# Altium PCB MAXREFDES117.PcbDoc
Units mil, origin at the board's own origin, x right, y up, seen from the top; angles counter-clockwise.
Board outline 915 x 550 mil, 2 copper layers (Top Layer, Bottom Layer); 2 components, 4 nets, 20 pads, 0 vias.
Unrouted connection lines stored in the file: 1.
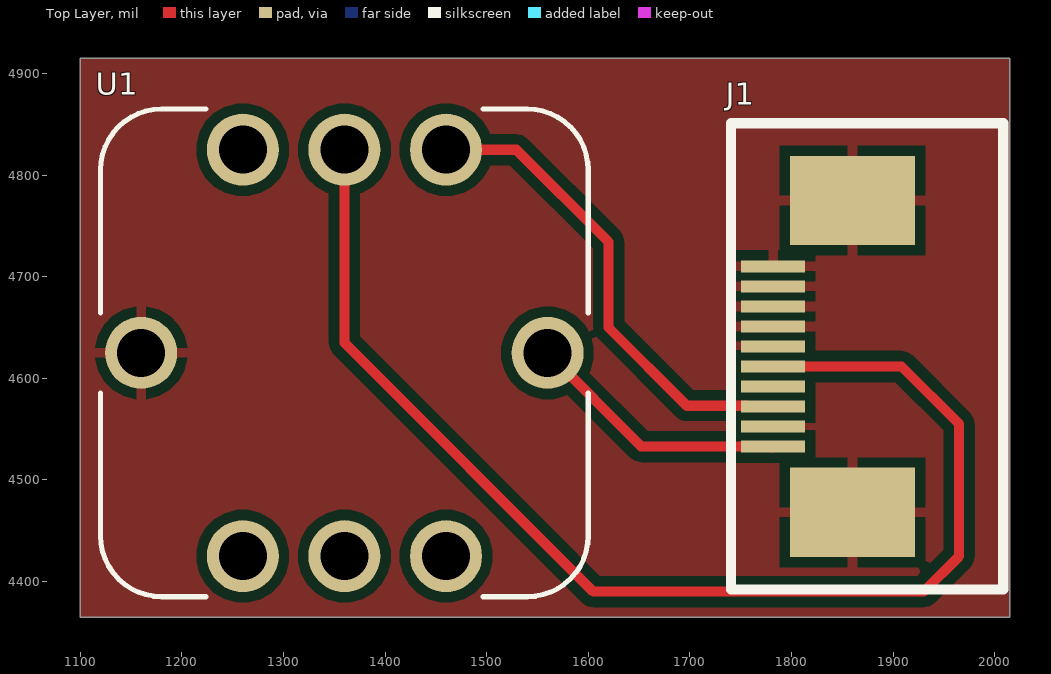
[diagram p0: Top Layer view]
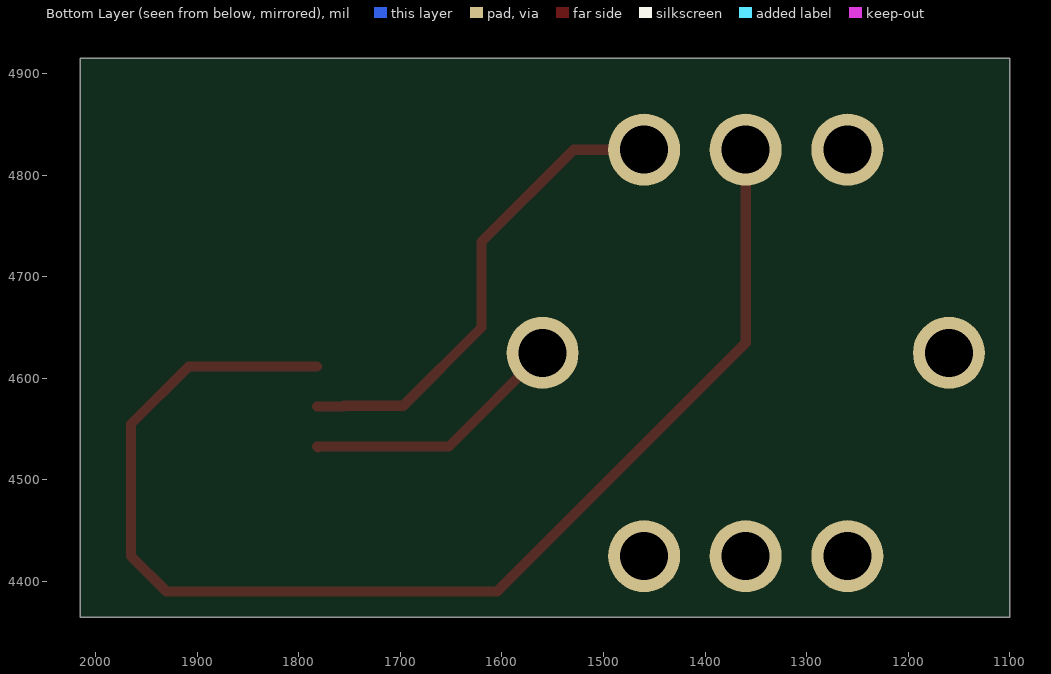
[diagram p1: Bottom Layer view, seen from below]

## Layer stack, top to bottom
Top Solder: solder mask 0.4, Solder Resist, Dk 3.5
Top Layer: signal copper 1.4
Dielectric 1: dielectric 12.6, FR-4, Dk 4.8
Bottom Layer: signal copper 1.4
Bottom Solder: solder mask 0.4, Solder Resist, Dk 3.5

## Board outline
1100,4365 2015,4365 2015,4915 1100,4915

## Design rules (kind name [scope] priority, off if disabled: settings)
Clearance [All] p1: gap=10 ignorepadtopadclearanceinfootprint=TRUE except(0: Arc-Hole Track-Hole SMDPad-Hole THPad-Hole Via-Hole Fill-Hole Poly-Hole Region-Hole Text-Hole; 8: Arc-Arc Arc-Track Arc-SMDPad Track-Track Track-SMDPad)
ComponentClearance [All] p1: gap=0 collisioncheckmode=3 verticalgap=0 showdistances=FALSE
PolygonConnect [All] p1: connectstyle=Relief reliefconductorwidth=10 reliefentries=4 polygonreliefangle="90 Angle" airgapwidth=10
RoutingVias [All] p1: holewidth=28 width=50 viastyle="Through Hole" minholewidth=28 minwidth=50 maxholewidth=28 maxwidth=50
SolderMaskExpansion [All] p1: expansion=4 istentingtop=FALSE
Width [All] p1: maxlimit=10 minlimit=10 preferedwidth=10
29 further rules are at their usual default settings.

## Components (designator, comment, footprint, x,y, rotation, side; value= is the part's Value field where it differs from the comment)
J1 "ZF5S-10-01-X-WT" ZF5S-10-01-X-WT 1782,4621.5 r90 top
U1 "MAXREFDES117#" MODULE_MAXREFDES117# 1360,4625 r0 top

## Footprints (in the part's own frame and the unit in brackets; to place one, negate y for a bottom-side part, rotate by r counter-clockwise, add the part's x,y. Pads: shape width x height; smd on the part's side, far side on the other; paste and mask are expansions set on the pad)
MODULE_MAXREFDES117# [mm]
  round 1.8 hole 1.2: GND(-5.08,0) INT(-2.54,5.08) INT1(-2.54,-5.08) SCL(0,5.08) SCL1(0,-5.08) SDA(2.54,5.08) SDA1(2.54,-5.08) VIN(5.08,0)
  silkscreen extent -6.1,-6.1 6.1,6.1
ZF5S-10-01-X-WT [mil]
  rect 12x63 smd mask+2: 1(-88.65,0) 2(-68.95,0) 3(-49.25,0) 4(-29.55,0) 5(-9.85,0) 6(9.85,0) 7(29.55,0) 8(49.25,0) 9(68.95,0) 10(88.65,0)
  rect 88x123 smd mask+2: G1(-153.5,-78) G2(153.5,-78)
  silkscreen extent -230,-226 230,42

## Part data
J1: "ZERO INSERTION FORCE 0.5MM ASSEMBLY, 01 LEAD STYLE.", Manufacturer=SAMTEC, CREATED="January 30, 2015 - Wendy Xin", PCB DECAL=ZF5S-10-01-X-WT
U1: "MAX1921, MAX14595, MAX30102 - Medical, Pulse Oximeter (PO or SpO2) Sensor Evaluation Board", Package=None, Availability=Unavailable, DigiKey-Purchase-URL=https://snapeda.com/shop?store=DigiKey&id=585423, MF="Maxim Integrated", Mouser-Purchase-URL=https://snapeda.com/shop?store=Mouser&id=585423, MP=MAXREFDES117#, Price=None, SnapEDA_Link=https://www.snapeda.com/parts/MAXREFDES117%23/Maxim%20Integrated/view-part/585423/?ref=snap

## Nets (pads, with @x,y where several pads share a name; then routed paths per layer and width w, separated by ;. In a path a pad name is that pad's centre, name@x,y a point inside that pad or via, vN(x,y) a via of type N, cw(c..) or ccw(c..) an arc to the next point about the centre after c; other vN are vias at no path point)
GND: J1.2 J1.4 J1.6 J1.7 J1.8 J1.9 J1.10 J1.G1 J1.G2 U1.GND
SCL: J1.5 U1.SCL | length 1247.4
  Top Layer w10: U1.SCL 1360,4635 1605,4390 1930,4390 1965,4425 1965,4555 1908.35,4611.65 J1.5
SDA: J1.3 U1.SDA | length 476
  Top Layer w10: U1.SDA 1529.25,4825 1620,4734.25 1620,4650 1697.05,4572.95 1755.5,4572.95 1756.2,4572.25 J1.3
VIN: J1.1 U1.VIN | length 261
  Top Layer w10: U1.VIN 1652.15,4532.85 1780,4532.85 1781,4531.85 J1.1
pads on no net: U1.INT U1.INT1 U1.SCL1 U1.SDA1

## Polygon pours and split planes (outlines as drawn)
GND on Top Layer "GND_L01" (solid, pour order 0): 1100,4915 2015,4915 2015,4365 1100,4365